# Altium PCB HEBoard_ver4.PcbDoc
Units mm, origin at the board's own origin, x right, y up, seen from the top; angles counter-clockwise.
Board outline 152.4 x 101.6 mm, 2 copper layers (Top Layer, Bottom Layer); 34 components, 20 nets, 162 pads, 0 vias.
Unrouted connection lines stored in the file: 92.
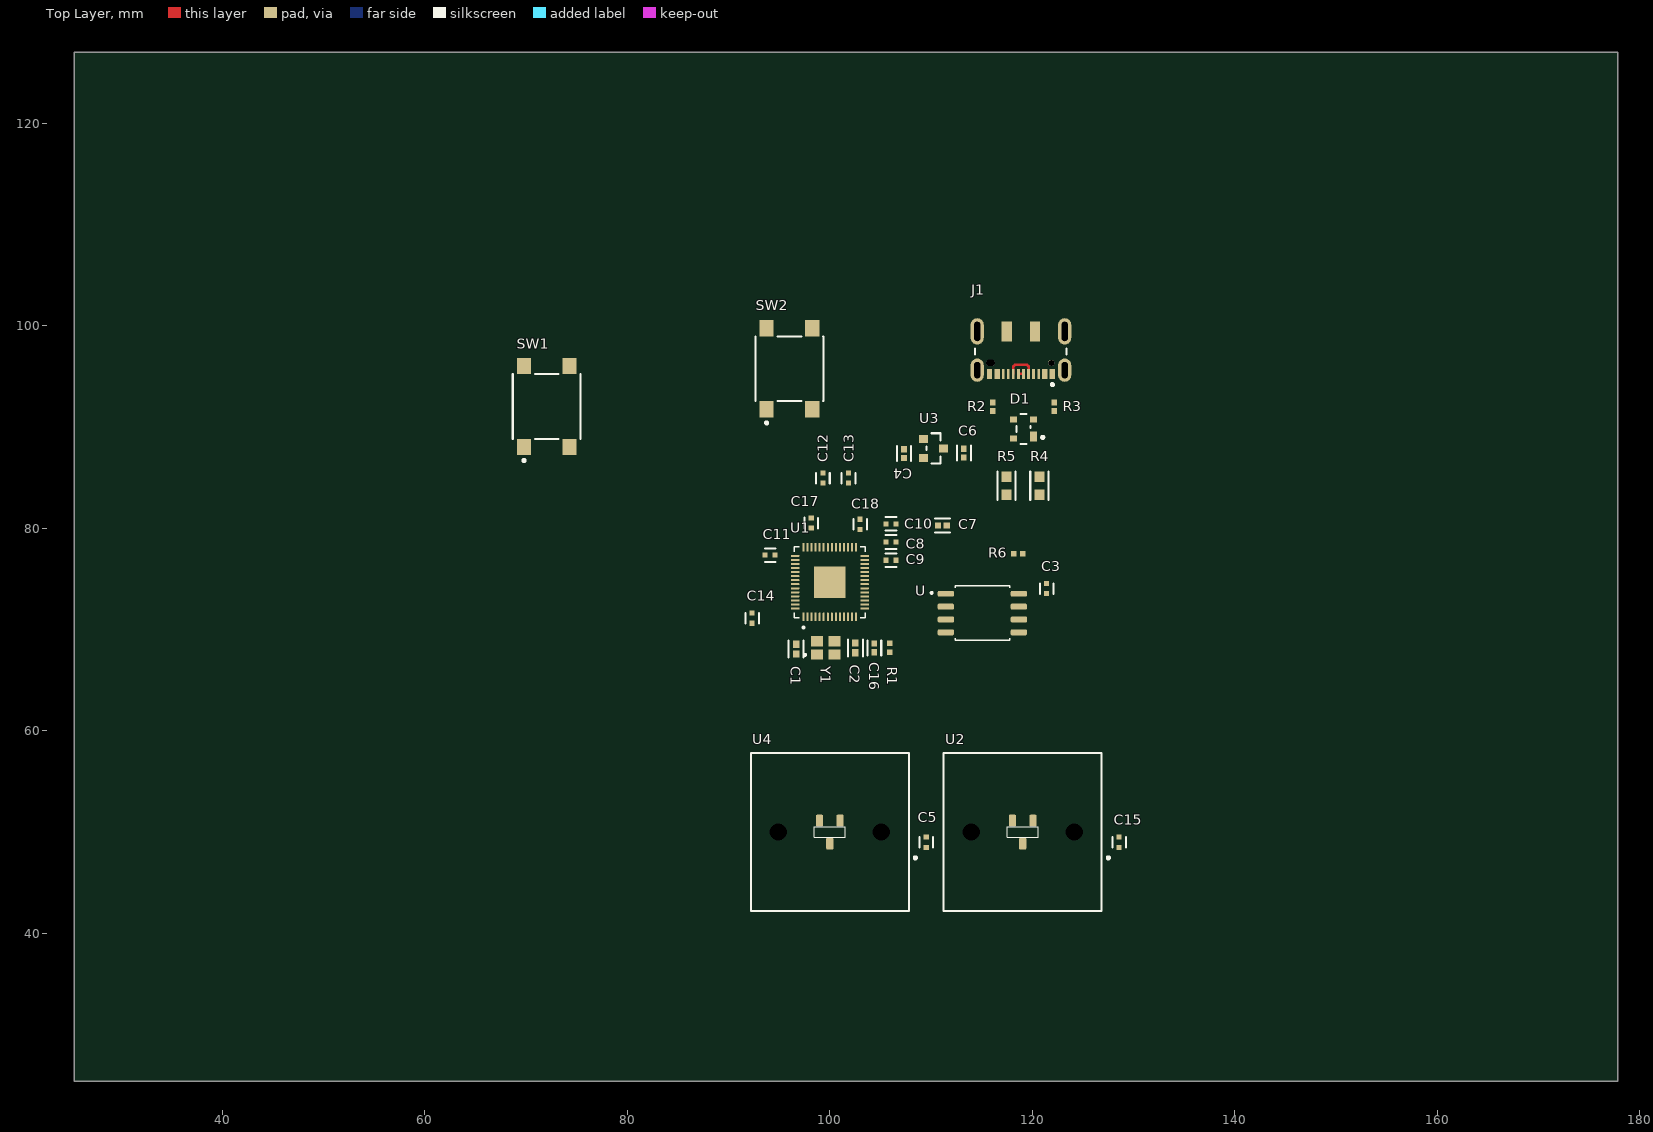
[diagram p0: Top Layer view]
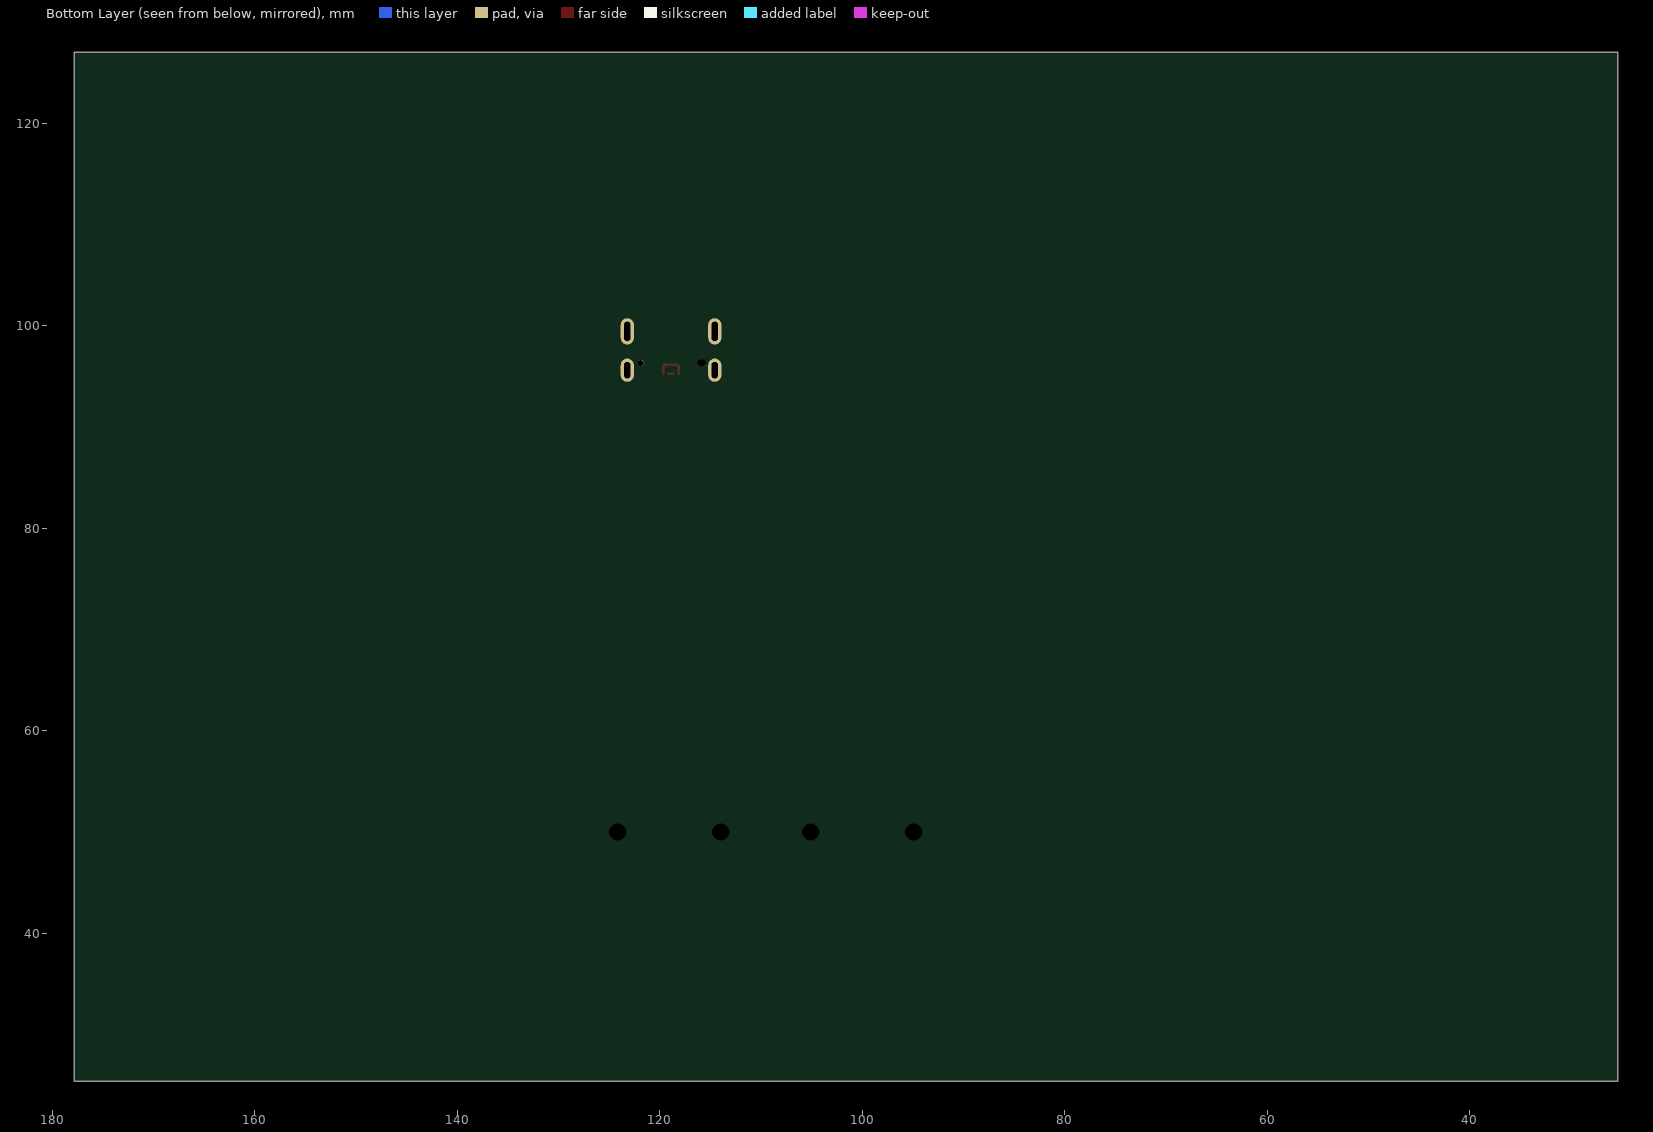
[diagram p1: Bottom Layer view, seen from below]

## Layer stack, top to bottom
Top Solder: solder mask 0.0102, Solder Resist, Dk 3.5
Top Layer: signal copper 0.0356
Dielectric 1: dielectric 0.32, FR-4, Dk 4.8
Bottom Layer: signal copper 0.0356
Bottom Solder: solder mask 0.0102, Solder Resist, Dk 3.5

## Board outline
25.4,25.4 177.8,25.4 177.8,127 25.4,127

## Design rules (kind name [scope] priority, off if disabled: settings)
BoardOutlineClearance [All] p1: gap=0.2 ignorepadtopadclearanceinfootprint=FALSE except(0.4: Arc-SplitBarrior Arc-SplitContinuation Track-SplitBarrior Track-SplitContinuation SMDPad-SplitBarrior SMDPad-SplitContinuation THPad-SplitBarrior THPad-SplitContinuation Via-SplitBarrior Via-SplitContinuation Fill-SplitBarrior Fill-SplitContinuation Poly-SplitBarrior Poly-SplitContinuation Region-SplitBarrior Region-SplitContinuation Text-SplitBarrior Text-SplitContinuation)
Clearance [All] p1: gap=0.2 ignorepadtopadclearanceinfootprint=FALSE except(0.089: Arc-Arc Arc-Track Arc-SMDPad Track-Track Track-SMDPad; 0.127: Arc-Via Track-Via SMDPad-SMDPad SMDPad-Via THPad-Via Via-Via; 0.15: Arc-Text Track-Text SMDPad-Text THPad-Text Via-Text Fill-Text Poly-Text Region-Text Text-Text)
DiffPairsRouting [All] p1: maxlimit=0.254 minlimit=0.254 mostfreqgap=0.254 toplayer_minwidth=0.254 toplayer_maxwidth=0.381 toplayer_prefwidth=0.381 bottomlayer_minwidth=0.254 bottomlayer_maxwidth=0.381 bottomlayer_prefwidth=0.381 maxuncoupledlength=12.7
HoleSize [All] p1: absolutevalues=TRUE maxlimit=6.3 minlimit=0.2 maxpercent=80.000 minpercent=20.000
MinimumAnnularRing [All] p1: minimumring=0.076
MinimumSolderMaskSliver [All] p1: minsoldermaskwidth=0.05
PolygonConnect PolygonConnect_1 [All] p1: thpad.connectstyle=Relief thpad.reliefconductorwidth=0.508 thpad.reliefentries=4 thpad.polygonreliefangle="90 Angle" thpad.airgapwidth=0.254 smdpad.connectstyle=Relief smdpad.reliefconductorwidth=0.508 smdpad.reliefentries=4 smdpad.polygonreliefangle="90 Angle" smdpad.airgapwidth=0.254 via.connectstyle=Direct via.reliefconductorwidth=0.508 via.reliefentries=4 via.polygonreliefangle="90 Angle" via.airgapwidth=0.254
RoutingCorners [All] p1: cornerstyle=Round minsetback=2.54 maxsetback=2.54
RoutingVias [All] p1: holewidth=0.5 width=1 viastyle="Through Hole" minholewidth=0.2 minwidth=0.45 maxholewidth=1 maxwidth=2
SilkToSilkClearance [All] p1: silktosilkclearance=0.1
SilkToSolderMaskClearance [IsPad] p1: minsilkscreentomaskgap=0.1 clearancetoexposedcopper=TRUE
SolderMaskExpansion [All] p1: expansion=0.05 istentingtop=FALSE
Width [All] p1: maxlimit=2.54 minlimit=0.089 preferedwidth=0.381
24 further rules are at their usual default settings.

## Classes and differential pairs
differential pair D: +D_P -D_N

## Components (designator, comment, footprint, x,y, rotation, side; value= is the part's Value field where it differs from the comment)
C1 "22pF" FP-GCM155-0_05-IPC_A 96.679,68.072 r90 top
C2 "22pF" FP-GCM155-0_05-IPC_A 102.521,68.199 r90 top
C3 "0.1uF" FP-CC0402-MFG 121.412,74.041 r90 top value="100 nF"
C4 "1uF" FP-GRM155-0_05-IPC_B 107.315,87.376 r90 top
C5 "0.1uF" FP-CC0402-MFG 109.525,49 r90 top value="100 nF"
C6 "1uF" FP-GRM155-0_05-IPC_B 113.236,87.415 r270 top
C7 "1uF" FP-GRM155-0_05-IPC_B 111.125,80.264 r0 top
C8 "0.1uF" FP-CC0402-MFG 106.045,78.641 r0 top value="100 nF"
C9 "0.1uF" FP-CC0402-MFG 106.045,76.841 r0 top value="100 nF"
C10 "0.1uF" FP-CC0402-MFG 106.045,80.441 r0 top value="100 nF"
C11 "0.1uF" FP-CC0402-MFG 94.107,77.343 r180 top value="100 nF"
C12 "0.1uF" FP-CC0402-MFG 99.314,84.955 r90 top value="100 nF"
C13 "0.1uF" FP-CC0402-MFG 101.854,84.955 r90 top value="100 nF"
C14 "0.1uF" FP-CC0402-MFG 92.329,71.12 r90 top value="100 nF"
C15 "0.1uF" FP-CC0402-MFG 128.575,49 r90 top value="100 nF"
C16 "1uF" FP-GRM155-0_05-IPC_B 104.394,68.199 r270 top
C17 "0.1uF" FP-CC0402-MFG 98.171,80.518 r90 top value="100 nF"
C18 "0.1uF" FP-CC0402-MFG 102.997,80.391 r90 top value="100 nF"
D1 "PRTR5V0U2X,215" FP-SOT143B-MFG 119.125,89.801 r180 top
J1 "DX07S016JA1R1500" FP-DX07S016JA1R1500-MFG 118.875,98.441 r180 top
R1 "ERJ-2RKF1001X" RESC1005X40X25NL05T05 105.918,68.199 r270 top
R2 "5.1k" RESC1005X40X25NL05T10 116.076,92 r270 top
R3 "5.1k" RESC1005X40X25NL05T10 122.174,92 r90 top
R4 "AC0603FR-0722RL" FP-AC0603-IPC_A 120.7,84.201 r90 top
R5 "AC0603FR-0722RL" FP-AC0603-IPC_A 117.45,84.201 r90 top
R6 "ERJ-2RKF1001X" RESC1005X40X25NL05T05 118.618,77.47 r0 top
SW1 "B3FS-1000" FP-B3FS-1000-MFG 72.045,92.037 r90 top
SW2 "B3FS-1000" FP-B3FS-1000-MFG 96.012,95.758 r90 top
U "W25Q16JVSSIQ" SOIC127P790X216-8N 115.062,71.628 r0 top
U1 "*" QFN40P700X700X90-57N 100,74.676 r90 top
U2 "SS39ET" CHRY-MX1A-11NW_V 119.05,50 r180 top
U3 "AP2120N-3.3TRG1" FP-SOT23-MFG 110.236,87.884 r0 top
U4 "SS39ET" CHRY-MX1A-11NW_V 100,50 r180 top
Y1 "ECS-120-8-36-CKM-TR" XTAL_ECS-120-8-36-CKM-TR 99.6,68.199 r0 top

## Footprints (in the part's own frame and the unit in brackets; to place one, negate y for a bottom-side part, rotate by r counter-clockwise, add the part's x,y. Pads: shape width x height; smd on the part's side, far side on the other; paste and mask are expansions set on the pad)
CHRY-MX1A-11NW_V [mil] "THD, 2-Leads, Body 15.6x15.6mm"
  rrect30% 28x45 smd: 1(-40,-45) 2(40,-45) 3(0,45)
  round 0 hole 67 unplated paste+0: MH2(-200,0) MH3(200,0)
  silkscreen extent -338,-307 307,307, body extent -307,-307 307,307, height 598
FP-AC0603-IPC_A [mm]
  rect 1.059x1.012 smd paste+0 mask+0: 1(-0.877,0) 2(0.877,0)
  silkscreen extent -1.41,-0.91 1.41,0.91, body extent -1.91,-1.01 1.91,1.01, height 0.25
FP-B3FS-1000-MFG [mm]
  rect 1.6x1.4 smd paste+0 mask+0: 1(-4,2.25) 2(4,2.25) 3(-4,-2.25) 4(4,-2.25)
  silkscreen extent -5.47,-3.35 3.2,3.35, body extent -4.9,-3.45 4.9,3.45, height 0.25
FP-CC0402-MFG [mm]
  rect 0.5x0.5 smd paste+0 mask+0: 1(-0.5,0) 2(0.5,0)
  silkscreen extent -0.53,-0.68 0.53,0.67, body extent -0.87,-0.48 0.87,0.48, height 0.25
FP-DX07S016JA1R1500-MFG [mm]
  rrect100% 1.3x2.3 hole 1.6 slot 0.6 at 0 deg paste-1000 mask+0: 1(-4.32,2.825) 2(4.32,2.825)
  rrect100% 1.3x2.6 hole 1.9 slot 0.6 at 0 deg paste-1000 mask+0: 3(-4.32,-1) 6(4.32,-1)
  rect 1x2 smd paste+0 mask+0: 4(-1.4,-1) 5(1.4,-1)
  rect 0.52x1 smd paste+0 mask+0: A1/B12(-3.1,3.2) A4/B9(-2.35,3.2) A12/B1(3.1,3.2) B4/A9(2.35,3.2)
  rect 0.27x1 smd paste+0 mask+0: A5(-1.75,3.2) A6(-0.25,3.2) A7(0.75,3.2) A8(1.75,3.2) B5(1.25,3.2) B6(0.25,3.2) B7(-0.75,3.2) B8(-1.25,3.2)
  round 0.6 hole 0.6 unplated paste-1000 mask+0: ""(-3,2.1)
  rrect100% 0.85x0.6 hole 0.6 slot 0.85 at 0 deg unplated paste-1000 mask+0: ""(3,2.1)
  silkscreen extent -4.52,0.67 4.52,4.37, body extent -5.07,-3.75 5.07,4.08, height 0.25
FP-GCM155-0_05-IPC_A [mm]
  rect 0.715x0.672 smd paste+0 mask+0: 1(-0.479,0) 2(0.479,0)
  silkscreen extent -0.84,-0.74 0.84,0.74, body extent -1.04,-0.54 1.04,0.54, height 0.25
FP-GRM155-0_05-IPC_B [mm]
  rect 0.615x0.572 smd paste+0 mask+0: 1(-0.429,0) 2(0.429,0)
  silkscreen extent -0.74,-0.69 0.74,0.69, body extent -0.89,-0.44 0.89,0.44, height 0.25
FP-SOT23-MFG [mm]
  rect 0.9x0.8 smd paste+0 mask+0: 1(-1,0.95) 2(-1,-0.95) 3(1,0)
  silkscreen extent -0.7,-1.5 0.7,1.5, body extent -1.55,-1.6 1.55,1.6, height 0.25
FP-SOT143B-MFG [mm]
  rect 0.7x1 smd paste-1000 mask+0: 1(-1,0.75)
  rect 0.7x0.6 smd paste-1000 mask+0: 2(-1,-0.95) 3(1,-0.95) 4(1,0.95)
  silkscreen extent -2.02,-1.5 0.7,1.5, body extent -1.5,-1.63 1.5,1.63, height 0.25
QFN40P700X700X90-57N [mm]
  rrect25% 0.84x0.2 smd: 1(-3.435,2.6) 2(-3.435,2.2) 3(-3.435,1.8) 4(-3.435,1.4) 5(-3.435,1) 6(-3.435,0.6) 7(-3.435,0.2) 8(-3.435,-0.2) 9(-3.435,-0.6) 10(-3.435,-1) 11(-3.435,-1.4) 12(-3.435,-1.8) 13(-3.435,-2.2) 14(-3.435,-2.6) 29(3.435,-2.6) 30(3.435,-2.2) 31(3.435,-1.8) 32(3.435,-1.4) 33(3.435,-1) 34(3.435,-0.6) 35(3.435,-0.2) 36(3.435,0.2) 37(3.435,0.6) 38(3.435,1) 39(3.435,1.4) 40(3.435,1.8) 41(3.435,2.2) 42(3.435,2.6)
  rrect25% 0.2x0.84 smd: 15(-2.6,-3.435) 16(-2.2,-3.435) 17(-1.8,-3.435) 18(-1.4,-3.435) 19(-1,-3.435) 20(-0.6,-3.435) 21(-0.2,-3.435) 22(0.2,-3.435) 23(0.6,-3.435) 24(1,-3.435) 25(1.4,-3.435) 26(1.8,-3.435) 27(2.2,-3.435) 28(2.6,-3.435) 43(2.6,3.435) 44(2.2,3.435) 45(1.8,3.435) 46(1.4,3.435) 47(1,3.435) 48(0.6,3.435) 49(0.2,3.435) 50(-0.2,3.435) 51(-0.6,3.435) 52(-1,3.435) 53(-1.4,3.435) 54(-1.8,3.435) 55(-2.2,3.435) 56(-2.6,3.435)
  rect 3.1x3.1 smd paste-0.57: 57(0,0)
  silkscreen extent -4.57,-3.5 3.5,3.5, body extent -3.5,-3.5 3.5,3.5, height 0.9
RESC1005X40X25NL05T05 [mm] "Chip Resistor, 2-Leads, Body 1.05x0.55mm, IPC Medium Density"
  rect 0.55x0.55 smd: 1(-0.45,0) 2(0.45,0)
  body extent -0.53,-0.28 0.53,0.28, height 0.4
RESC1005X40X25NL05T10 [mm] "Chip Resistor, 2-Leads, Body 1.00x0.50mm, IPC Medium Density"
  rect 0.6x0.55 smd: 1(-0.425,0) 2(0.425,0)
  body extent -0.53,-0.27 0.53,0.28, height 0.4
SOIC127P790X216-8N [mm]
  rrect50% 1.61x0.58 smd: 1(-3.605,1.905) 2(-3.605,0.635) 3(-3.605,-0.635) 4(-3.605,-1.905) 5(3.605,-1.905) 6(3.605,-0.635) 7(3.605,0.635) 8(3.605,1.905)
  silkscreen extent -5.1,-2.69 2.69,2.69
XTAL_ECS-120-8-36-CKM-TR [mm]
  rect 1.2x1 smd: 1(-0.85,-0.65) 2(0.85,-0.65) 3(0.85,0.65) 4(-0.85,0.65)
  silkscreen extent -2.15,-0.8 -1.95,-0.6

## Part data
C1 C2: library part CMP-06035-026112-1, "Ceramic Capacitor for Automotive 22pF ±5% 50VDC C0G 0402 Paper T/R", Case Code (Imperial)=0402, Case Code (Metric)=1005, Dielectric=C0G, Max Operating Temperature=125°C, Min Operating Temperature=-55°C, Package Quantity=1, Ratings=AEC-Q200, Tolerance=5%, Voltage Rating=50V, Capacitance=22pF, Case/Package=0402, Depth=0.5mm, Height=0.5mm, Lead Free="Lead Free", Length=1mm, Mount="Surface Mount", Packaging="Tape and Reel", Termination=SMD/SMT, Thickness=0.022inch, Voltage Rating (DC)=50V, Weight=0.000212oz, Width=0.5mm
C3 C5 C8 C9 C10 C11 C12 C13 C14 C15 C17 C18: library part CMP-03422-000748-1, "CAP CER 0.1UF 10V X7R 0402", Capacitance="100 nF", Manufacturer=YAGEO, Manufacturer Part Number=CC0402KRX7R6BB104, Package=CC0402, Temperature="-55°C to +125°C", Temperature Characteristic=X7R, Temperature Coefficient=30ppm/°C, Temperature Range High=+125°C, Temperature Range Low=-55°C, Tolerance=0.1, Voltage Rating="10 V", Automotive=No, Automotive Grade=NA, Category=Cap, ComponentLink2Description=Datasheet, ComponentLink2URL=http://www.yageo.com/documents/recent/UPY-GP_NP0_16V-to-50V_16.pdf, Device Class L1="Passive Components", Device Class L2=Capacitors, Device Class L3="Ceramic Capacitors", Digikey Description="CAP CER 0.1UF 10V X7R 0402", Footprint Url=http://www.yageo.com/exep/pages/download/literatures/UPY-C_GEN_24.pdf, Height=0.55mm, Ipc Land Pattern Name=CAPC10050X50, Lead Free=Yes, Material=Ceramic, Mouser Description="Multilayer Ceramic Capacitors MLCC - SMD/SMT 100nF 10V X7R 10%", Octopart=https://octopart.com/cc0402krx7r6bb104-yageo-8376509, RoHS=TRUE
C4 C6 C7 C16: library part CMP-06035-003845-1, "Chip Multilayer Ceramic Capacitors for General Purpose, 0402, 1.0uF, X7R, 15%, 10%, 6.3V", Case Code (Imperial)=0402, Case Code (Metric)=1005, Dielectric=X7R, Max Operating Temperature=125°C, Min Operating Temperature=-55°C, Package Quantity=50000, Tolerance=10%, Voltage Rating=6.3V, Capacitance=1uF, Case/Package=0402, Length=0.039inch, Mount="Surface Mount", Packaging="Tape and Reel", Termination=SMD/SMT, Thickness=0.022inch, Voltage Rating (DC)=6.3V, Weight=0.000212oz, Width=0.02inch
D1: library part CMP-14436-000007-1, "TVS DIODE 5.5V SOT143B"
J1: library part CMP-19038-000003-1, "CONN RCP USB2.0 TYP C 24P SMD RA"
R1 R6: library part CMP-1011-00510-4, "Chip Resistor, 1 KOhm, +/- 1%, 100 mW, -55 to 155 degC, 0402 (1005 Metric), RoHS, Tape and Reel", Case Code (Imperial)=0402, Case Code (Metric)=1005, Manufacturer="Basic Passives", Max Operating Temperature="155 degC", Min Operating Temperature="-55 degC", Package Quantity=10000, Power Rating="100 mW", Resistance="1 KOhm", Tolerance=1%, Voltage Rating="50 V", Case\/Package=0402, ComponentLink1Description="Manufacturer URL", ComponentLink1URL=http://www.panasonic.com/, ComponentLink2Description=Datasheet, ComponentLink2URL=http://industrial.panasonic.com/cdbs/www-data/pdf/RDA0000/AOA0000C86.pdf, DatasheetVersion=04/2015, Height="0.35 mm", Length="1 mm", Mount="Surface Mount", Mounting Technology="Surface Mount", PackageDescription="2-Pin Surface Mount Device, Body 1 x 0.5 mm", PackageReference=0402, Packaging="Tape and Reel", PartNumber=ERJ-2RKF1001X, Pins=2, Radiation Hardening=No, REACH SVHC=Yes, RoHSCompliant=true, Width="0.5 mm"
R2 R3: library part CMP-2002-07753-1, Manufacturer="Yageo / Phycomp", Part Number=RC0402FR-075K1L
R4 R5: library part CMP-03412-026181-2, "RES 22Ω 1.00% 0.1W 0603", Case Code (Imperial)=0603, Case Code (Metric)=1608, Max Operating Temperature=155°C, Max Power Dissipation=100mW, Min Operating Temperature=-55°C, Ratings=AEC-Q200, Resistance=22R, Resistor Type="Thick Film", Temperature Coefficient=100ppm/°C, Tolerance=1%, Voltage Rating=50V, Case/Package=0603, Features="Moisture Resistant", Height=0.45mm, Length=1.6mm, Number of Terminations=2, Packaging="Tape and Reel", Power Rating=100mW, RoHS Compliant=Yes, Series=AC, Termination=SMD/SMT, Weight=7.1E-05oz, Width=0.8mm
SW1 SW2: library part CMP-08834-000004-1, "SWITCH TACTILE SPST-NO 0.05A 24V", Ambient Temperature Range High=+70°C, Ambient Temperature Range Low=-25°C, Contact Current Rating=50mA, Contact Resistance=100mΩ, Manufacturer="Omron Electronics Inc-EMC Div", Operating Force=0.98N, Package=0, Temperature="-25°C to +70°C", Voltage Rating Dc=24V, Automotive=No, Category=Switch, ComponentLink2Description=Datasheet, ComponentLink2URL=https://omronfs.omron.com/en_US/ecb/products/pdf/en-b3fs.pdf, Device Class L1=Electromechanical, Device Class L2=Switches, Device Class L3="Tactile Switches", Digikey Description="SWITCH TACTILE SPST-NO 0.05A 24V", Electromechanical Life=1000000Cycles, Height=3.3mm, Lead Free=Yes, Manufacturer Part Number=B3FS-1000, Mount="Surface Mount", Mouser Description="Tactile Switches 6X6X3.1mm 100gF", Octopart=https://octopart.com/b3fs-1000-omron-116581, RoHS=TRUE, Temperature Range High=+70°C, Temperature Range Low=-25°C, Throw Configuration=SPST-NO
U: "FLASH - NOR Memory IC 16Mb _2M x 8_ SPI - Quad I/O 133MHz 8-SOIC", Package="SOIC-8 Winbond", Availability=Unavailable, MF="Winbond Electronics", MP=W25Q16JVSSIQ, Price=None, SnapEDA_Link=https://www.snapeda.com/parts/W25Q16JVSSIQ/Winbond%20Electronics/view-part/618098/?ref=snap
U1: library part RP2040, "RP2040 chip for Raspberry Pi Pico - ARMÂ® CortexÂ®-M0+ MCU 32-Bit", Package=None, Availability="In Stock", Check_prices=https://www.snapeda.com/parts/RP2040/Raspberry+Pi/view-part/?ref=eda, MF="Raspberry Pi", MP=RP2040, Price=None, Purchase-URL=https://pricing.snapeda.com/search/part/RP2040/?ref=eda, SnapEDA_Link=https://www.snapeda.com/parts/RP2040/Raspberry+Pi/view-part/?ref=snap
U2 U4: "analog Hall Effect Sensor 1.5 mA 2.7 - 6.5 V dc", Package=None, Check_prices=https://www.snapeda.com/parts/SS39ET/Honeywell+Sensing+and+Productivity+Solutions/view-part/?ref=eda, MF="Honeywell Sensing and Productivity Solutions", MP=SS39ET, SnapEDA_Link=https://www.snapeda.com/parts/SS39ET/Honeywell+Sensing+and+Productivity+Solutions/view-part/?ref=snap
U3: library part CMP-12756-000008-1, "IC REG LINEAR 3.3V 150MA SOT23", Dropout Voltage=300mV, Manufacturer="Diodes Inc.", Max Junction Temp=+85°C, Max Supply Voltage=6V, Min Supply Voltage=2V, Nominal Supply Current=25uA, Output Current=150mA, Output Voltage=3.3V, Package=SOT23, Temperature="-40°C to +85°C", Temperature Range Low=-40°C, Accuracy Percentage=2%, Automotive=No, Category=IC, ComponentLink2Description=Datasheet, ComponentLink2URL=https://www.diodes.com/assets/Package-Files/SOT23.pdf, Device Class L1="Integrated Circuits (ICs)", Device Class L2="Power Management ICs", Device Class L3="Voltage Regulators - Linear", Digikey Description="IC REG LINEAR 3.3V 150MA SOT23", Footprint Url=https://www.diodes.com/assets/Package-Files/SOT23.pdf, Height=1.1mm, Ipc Land Pattern Name=SOT92P240X102-3, Lead Free=Yes, Manufacturer Part Number=AP2120N-3.3TRG1, Mouser Description="AP2120 Series 3.3 V 0.15 A Surface Mount CMOS LDO Regulator - SOT23", Number Of Outputs=1, Octopart=https://octopart.com/ap2120n-3.3trg1-diodes+inc.-30954573, Output Type=Fixed, RoHS=TRUE, Standoff Height=0.013mm, Temperature Range High=+85°C
Y1: "The minature ECX-2236 is a compact SMD Crystal. The industry standard 2.5 x 2.0 x 0.55 mm ceramic package is ideal for todayâ€™s SMD manufacturing environment.", Package=None, Availability=Unavailable, MP=ECS-120-8-36-CKM-TR, Price=None

## Nets (pads, with @x,y where several pads share a name; then routed paths per layer and width w, separated by ;. In a path a pad name is that pad's centre, name@x,y a point inside that pad or via, vN(x,y) a via of type N, cw(c..) or ccw(c..) an arc to the next point about the centre after c; other vN are vias at no path point)
+1V1: C16.1 C17.1 C18.1 U1.23 U1.45 U1.50
+3V3: C3.1 C4.1 C7.1 C8.1 C9.1 C10.1 C11.1 C12.1 C13.1 C14.1 R1.2 U1.1 U1.10 U1.22 U1.33 U1.42 U1.43 U1.44 U1.48 U1.49 U2.1 U3.2 U4.1 U.8
+5V: C6.1 D1.4 J1.A4/B9 J1.B4/A9 U3.3
CS: R6.1 U1.56 U.1
D_N: D1.3 J1.A7 J1.B7 R4.1 R4.2 U1.46 | length 3.1
  Top Layer w0.254: J1.A7 118.125,95.99 118.274,96.139 119.485,96.139 119.634,95.99 119.634,95.78 119.633,95.779 119.633,95.249 J1.B7
D_P: D1.2 J1.A6 J1.B6 R5.1 R5.2 U1.47 | length 0.5
  Top Layer w0.254: J1.B6 J1.A6
GND: C1.2 C2.2 C3.2 C4.2 C5.1 C6.2 C7.2 C8.2 C9.2 C10.2 C11.2 C12.2 C13.2 C14.2 C15.1 C16.2 C17.2 C18.2 D1.1 J1.A1/B12 J1.A12/B1 R2.1 R3.1 SW1.1 SW2.2 U1.19 U1.57 U2.3 U3.1 U4.3 U.4 Y1.2 Y1.4
NetJ1_A5: J1.A5 R3.2
NetJ1_B5: J1.B5 R2.2
NetR6_2: R6.2 SW1.3
QSPI_SCLK: U1.52 U.6
RESET: R1.1 SW2.3 U1.26
SD0: U1.53 U.5
SD1: U1.55 U.2
SD2: U1.54 U.3
SD3: U1.51 U.7
SW1_OUT: C5.2 U1.38 U2.2
SW2_OUT: C15.2 U1.39 U4.2
XTAL_IN: C1.1 U1.20 Y1.1
XTAL_OUT: C2.1 U1.21 Y1.3
pads on no net: J1. J1.1 J1.2 J1.3 J1.4 J1.5 J1.6 J1.A8 J1.B8 SW1.2 SW1.4 SW2.1 SW2.4 U1.2 U1.3 U1.4 U1.5 U1.6 U1.7 U1.8 U1.9 U1.11 U1.12 U1.13 U1.14 U1.15 U1.16 U1.17 U1.18 U1.24 U1.25 U1.27 U1.28 U1.29 U1.30 U1.31 U1.32 U1.34 U1.35 U1.36 U1.37 U1.40 U1.41 U2.MH2 U2.MH3 U4.MH2 U4.MH3